# Altium PCB PCB.PcbDoc
Units mm, origin at the board's own origin, x right, y up, seen from the top; angles counter-clockwise.
Board outline 84 x 56 mm, 2 copper layers (Top Layer, Bottom Layer); 30 components, 32 nets, 141 pads, 32 vias.
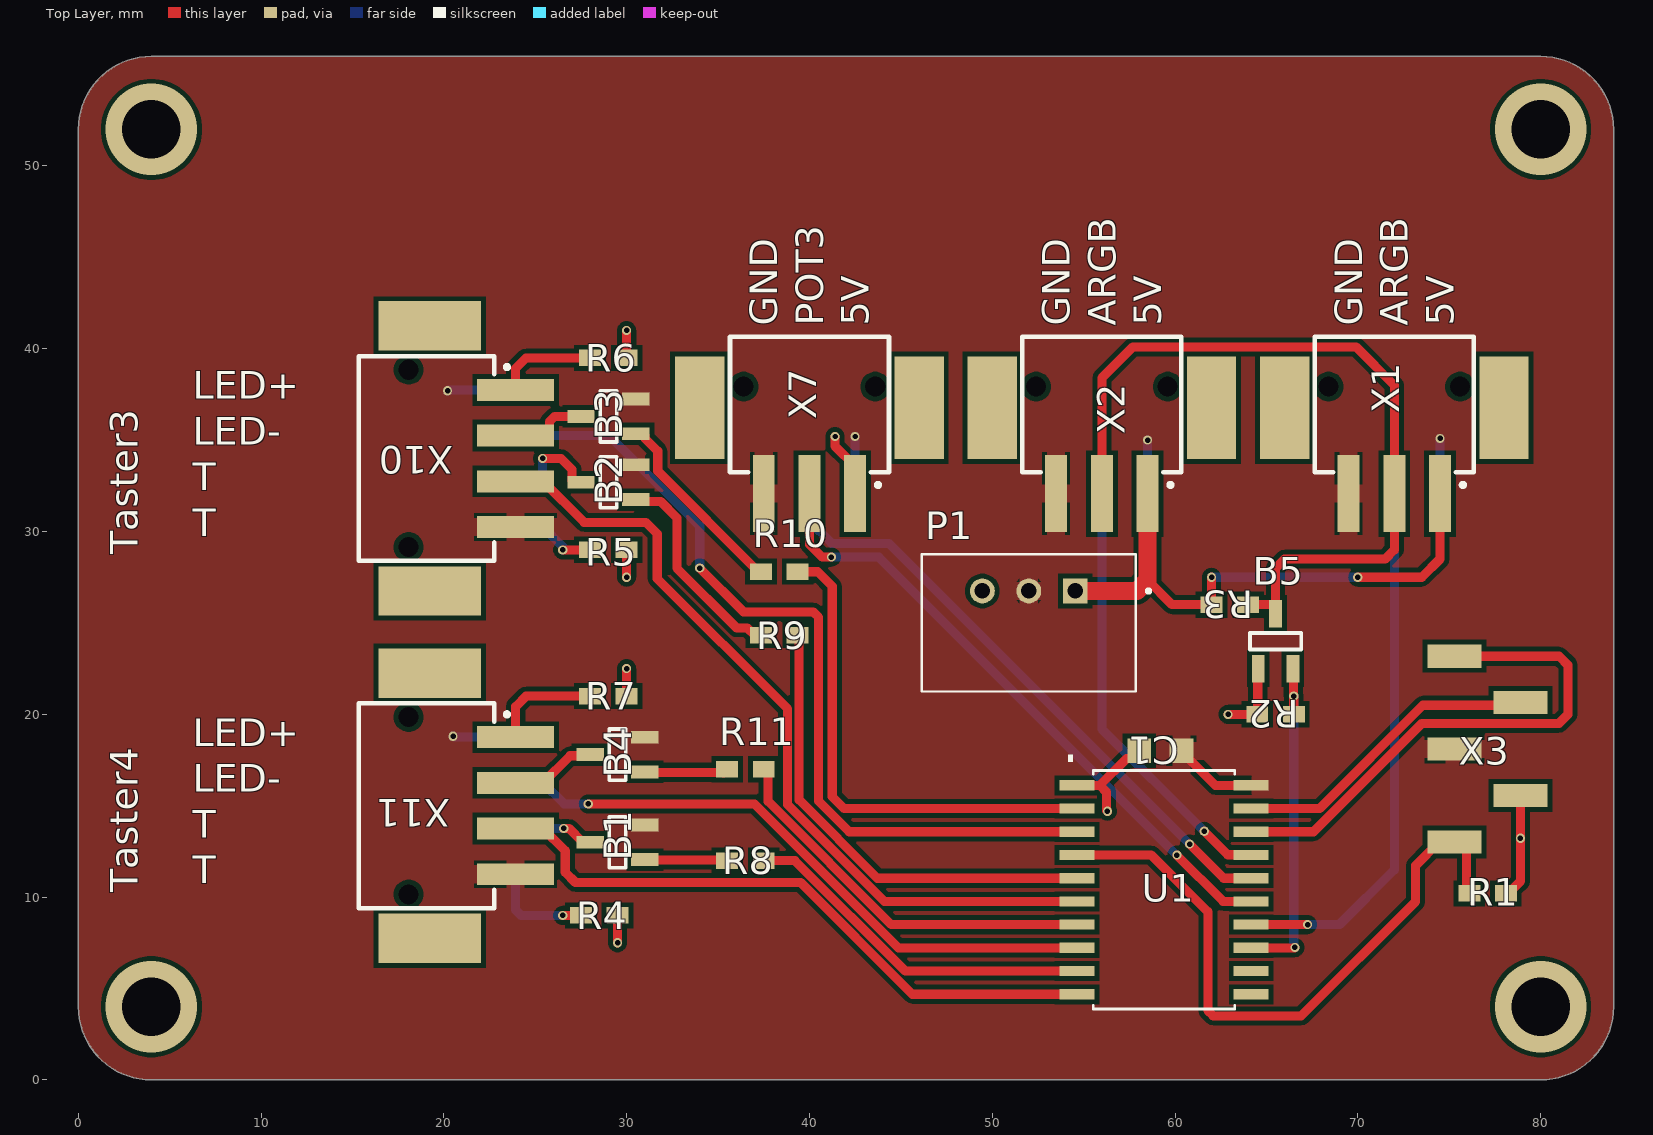
[diagram p0: Top Layer view]
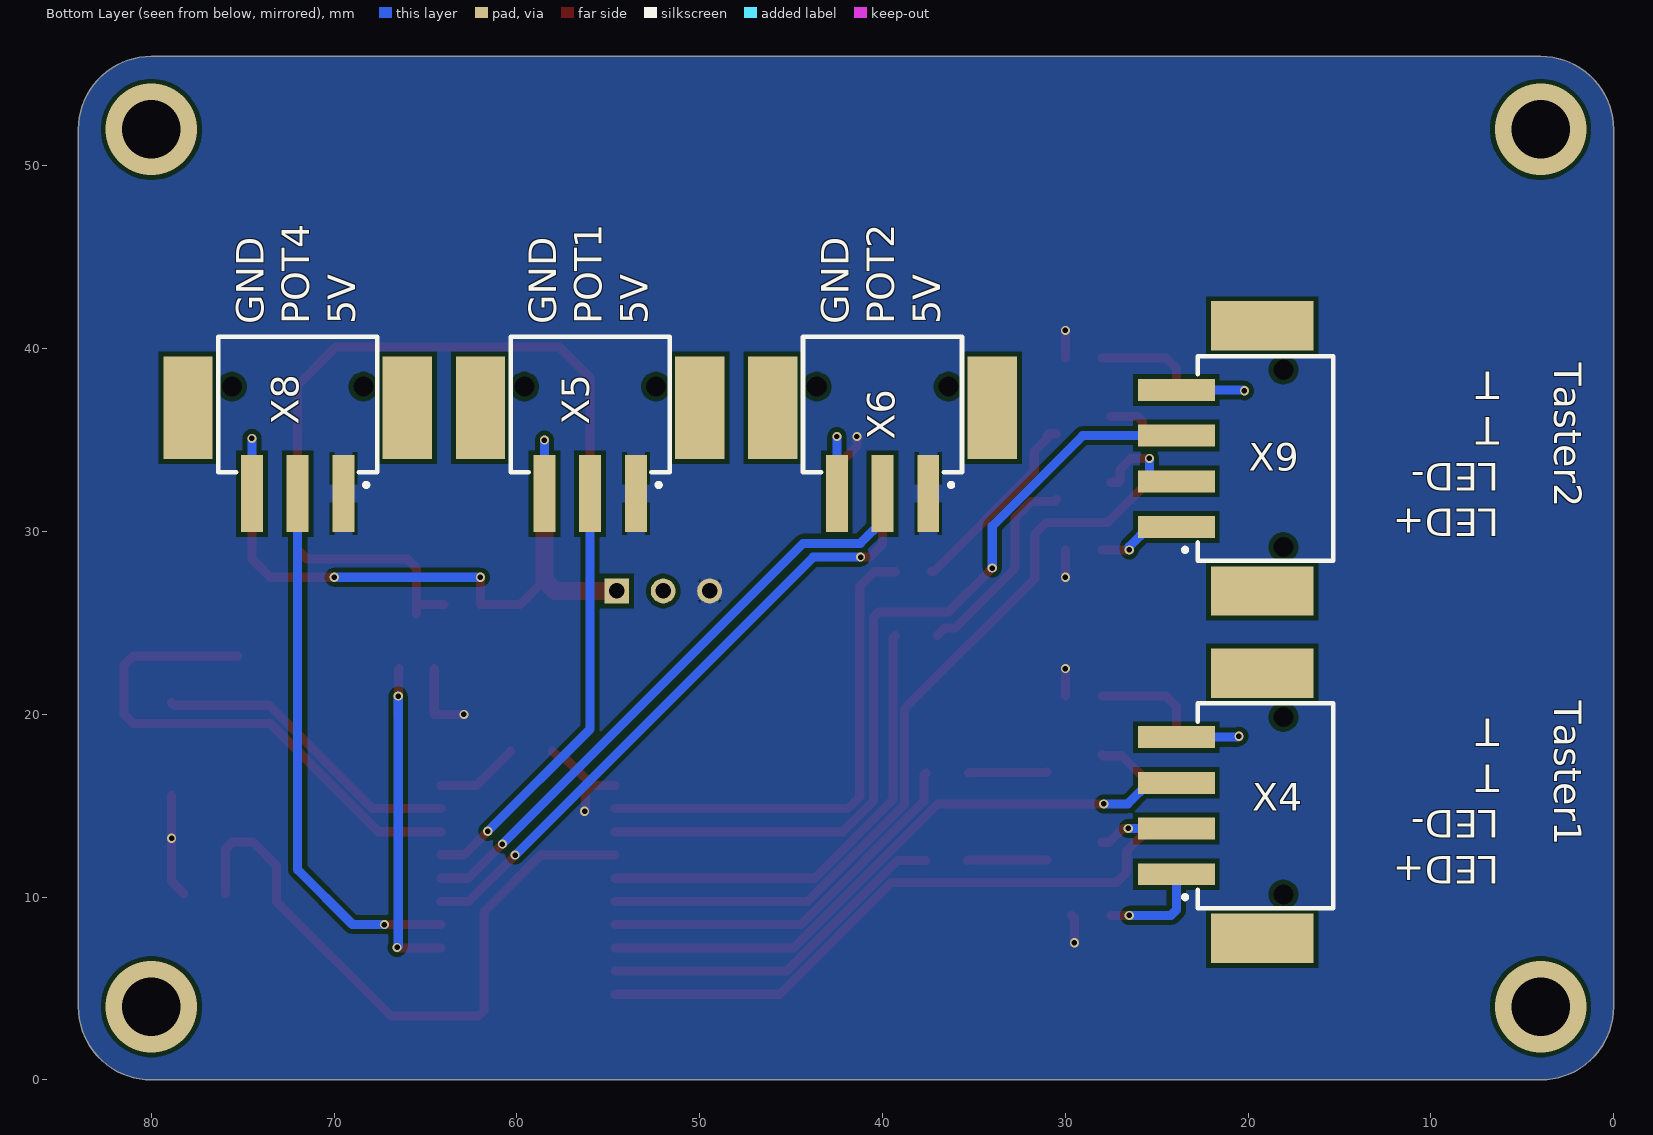
[diagram p1: Bottom Layer view, seen from below]
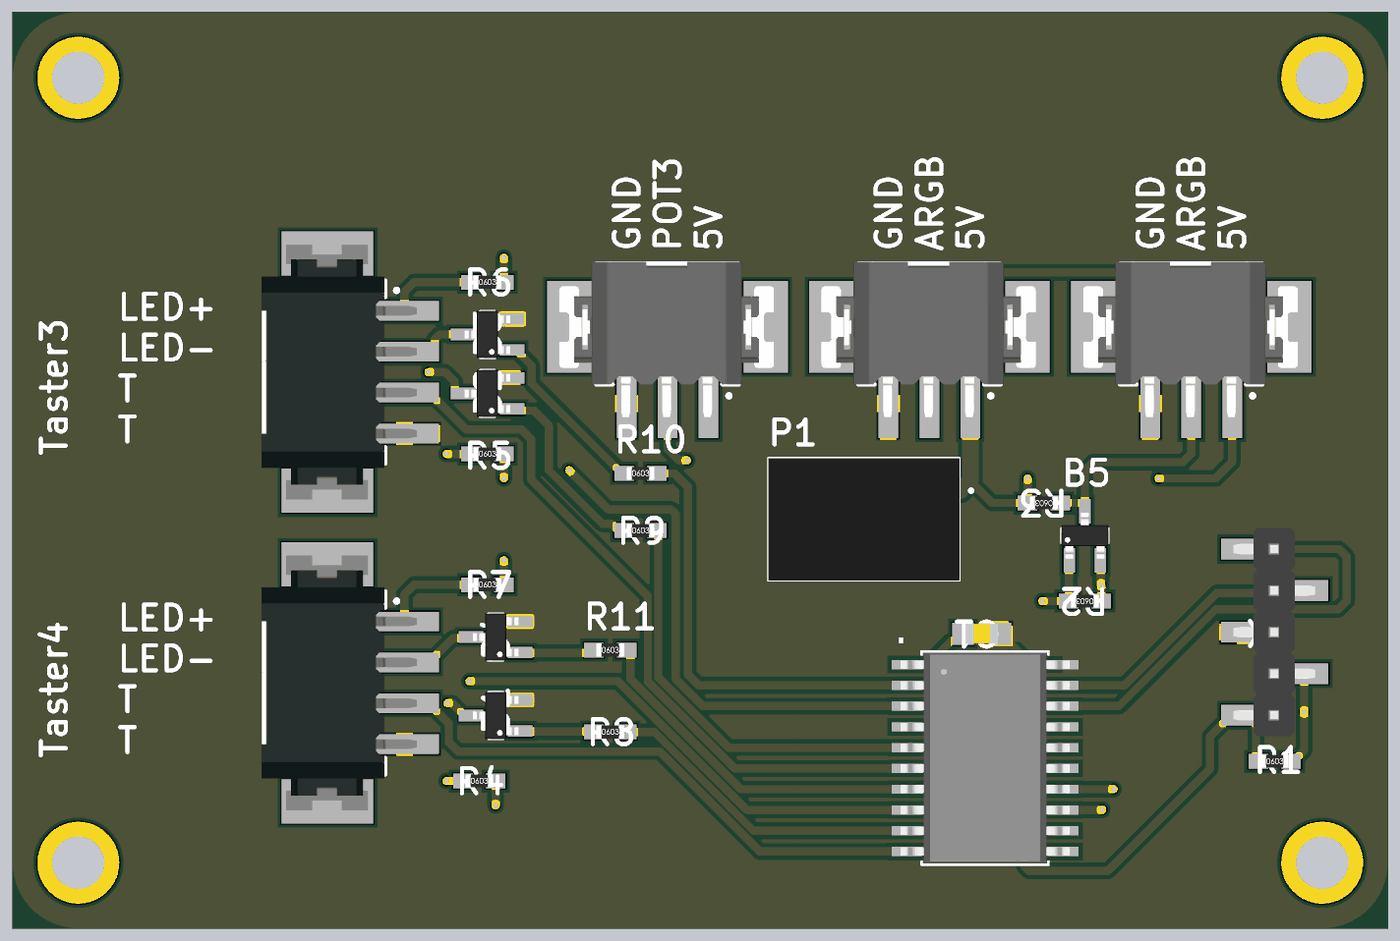
[diagram p2: 3D render of the assembled board from above, using the file's embedded part models]
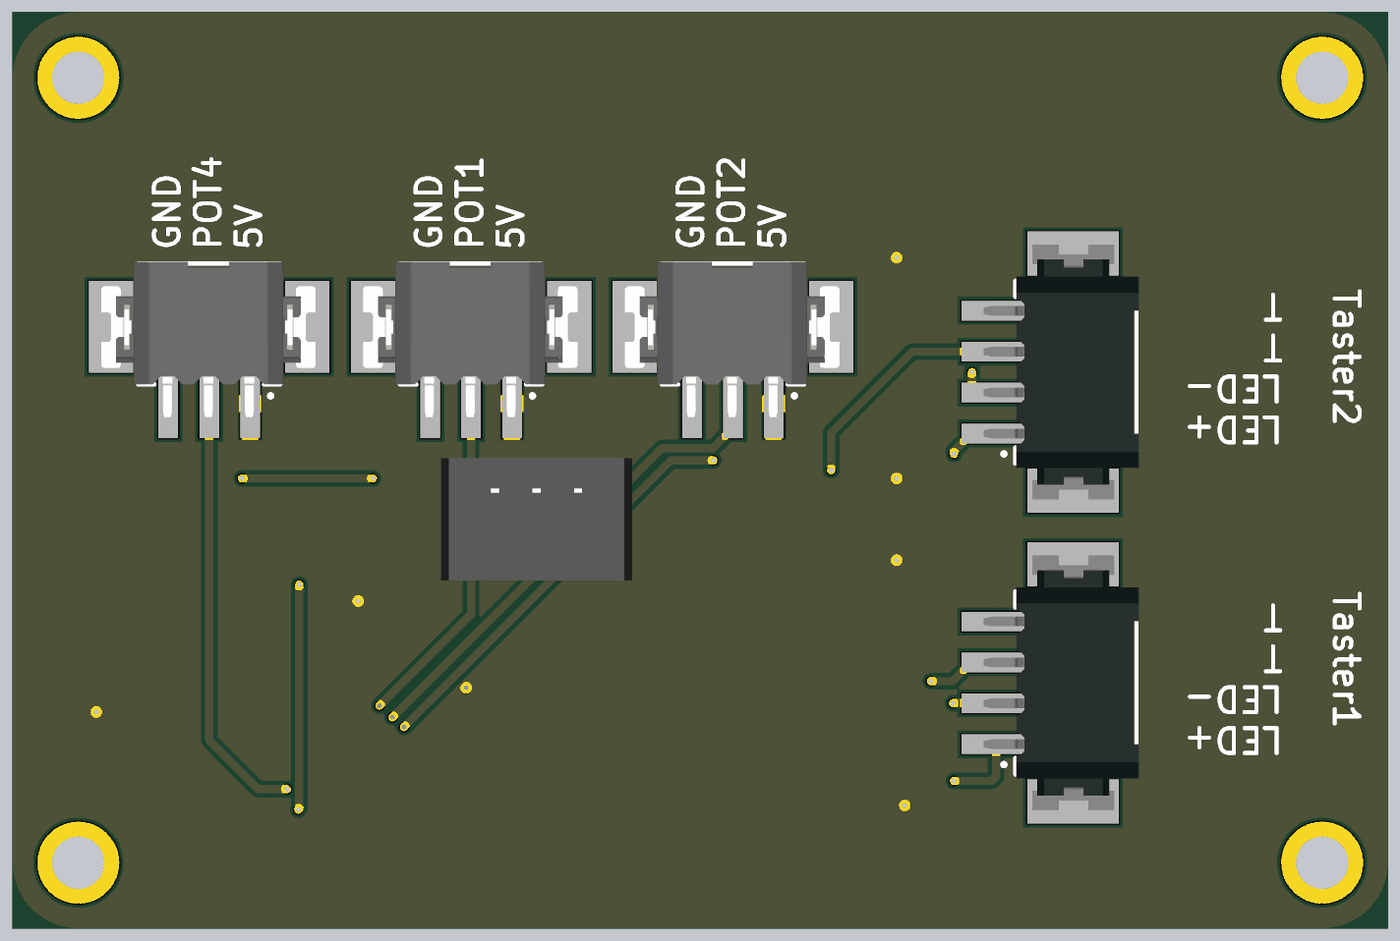
[diagram p3: 3D render of the assembled board from below, using the file's embedded part models]

## Layer stack, top to bottom
Top Solder: solder mask 0.0102, Solder Resist, Dk 3.5
Top Layer: signal copper 0.0356
Dielectric 1: dielectric 0.32, FR-4, Dk 4.8
Bottom Layer: signal copper 0.0356
Bottom Solder: solder mask 0.0102, Solder Resist, Dk 3.5

## Board outline
0,4 0,52 cw(c4,52) 4,56 80,56 cw(c80,52) 84,52 84,4 cw(c80,4) 80,0 4,0 cw(c4,4)

## Design rules (kind name [scope] priority, off if disabled: settings)
Clearance [All] p1: gap=0.254 ignorepadtopadclearanceinfootprint=FALSE except(0: SMDPad-Hole THPad-Hole Via-Hole Fill-Hole Poly-Hole Region-Hole Text-Hole; 0.127: Arc-Arc Arc-Track Track-Track SMDPad-SMDPad; 0.15: Arc-Text Track-Text SMDPad-Text THPad-Text Via-Text Text-Text; 0.2: Arc-SMDPad Arc-THPad Track-SMDPad Track-THPad Fill-Text Poly-Text Region-Text; 0.5: THPad-THPad)
Height [All] p1: minheight=0 maxheight=50 prefheight=12.7
HoleSize [All] p1: absolutevalues=TRUE maxlimit=3.2 minlimit=0.025 maxpercent=80.000 minpercent=20.000
MinimumSolderMaskSliver [OnLayer('Top Layer') vs OnLayer('Top Layer')] p1: minsoldermaskwidth=0.04
PlaneConnect [All] p1: planeconnectstyle=Relief reliefexpansion=0.508 reliefentries=4 reliefconductorwidth=0.3 reliefairgap=0.18
PolygonConnect [All] p1: thpad.connectstyle=Relief thpad.reliefconductorwidth=1.016 thpad.reliefentries=4 thpad.polygonreliefangle="90 Angle" thpad.airgapwidth=0.15 smdpad.connectstyle=Relief smdpad.reliefconductorwidth=1.016 smdpad.reliefentries=4 smdpad.polygonreliefangle="90 Angle" smdpad.airgapwidth=0.15 via.connectstyle=Direct via.reliefconductorwidth=1.016 via.reliefentries=4 via.polygonreliefangle="90 Angle" via.airgapwidth=0.15
RoutingVias [All] p1: holewidth=0.3 width=0.5 viastyle="Through Hole" minholewidth=0.2 minwidth=0.45 maxholewidth=2 maxwidth=3
SilkToSilkClearance [All] p1: silktosilkclearance=0.1
SilkToSolderMaskClearance [IsPad] p1: minsilkscreentomaskgap=0 clearancetoexposedcopper=TRUE
SolderMaskExpansion SolderMaskExpansion_1 [All] p1: expansion=0.102 istentingtop=FALSE
SolderMaskExpansion SolderMaskExpansion_Via [All] p2: expansion=-25 istentingtop=TRUE
Width [All] p1: maxlimit=10 minlimit=0.127 preferedwidth=0.54 minimp=50.000000 maximp=50.000000 favimp=50.000000
24 further rules are at their usual default settings.

## Components (designator, comment, footprint, x,y, rotation, side; value= is the part's Value field where it differs from the comment)
B1 "N Kanal FET" SOT23-3 29.5,13 r90 top
B2 "N Kanal FET" SOT23-3 29,32.7 r90 top
B3 "N Kanal FET" SOT23-3 29,36.3 r90 top
B4 "N Kanal FET" SOT23-3 29.5,17.8 r90 top
B5 "N Kanal FET" SOT23-3 65.5,24 r0 top
C1 "Capacitor 0805" "CAP CER 0805 H" 59.2,18 r180 top value=0.1uF
P1 "TSR_1-2450" TSR_1-2450 52,25 r180 top
R1 "Resistor 0603" "RES 0603 H" 77.1,10.2 r0 top value=10k
R2 "Resistor 0603" "RES 0603 H" 65.5,20 r180 top value=1k
R3 "Resistor 0603" "RES 0603 H" 63,26 r180 top value=1k
R4 "Resistor 0603" "RES 0603 H" 28.5,9 r0 top value=150R
R5 "Resistor 0603" "RES 0603 H" 29,29 r0 top value=150R
R6 "Resistor 0603" "RES 0603 H" 29,39.5 r0 top value=150R
R7 "Resistor 0603" "RES 0603 H" 29,21 r0 top value=150R
R8 "Resistor 0603" "RES 0603 H" 36.5,12 r0 top value=150R
R9 "Resistor 0603" "RES 0603 H" 38.354,24.315 r0 top value=150R
R10 "Resistor 0603" "RES 0603 H" 38.354,27.81 r0 top value=150R
R11 "Resistor 0603" "RES 0603 H" 36.5,17 r0 top value=150R
U1 "PIC18F16Q40-I/SO" SOIC20_SO_MCH-M 59.4,10.4 r0 top
X1 "1778780" "Phoenix 3Pos Header" 72,35 r180 top
X2 "1778780" "Phoenix 3Pos Header" 56,35 r180 top
X3 "ICSP" 5Pin_Header 77.1,18.1 r90 top
X4 "1778780" "Phoenix 4Pos Header" 21,15 r90 bottom
X5 "1778780" "Phoenix 3Pos Header" 56,35 r0 bottom
X6 "1778780" "Phoenix 3Pos Header" 40,35 r0 bottom
X7 "1778780" "Phoenix 3Pos Header" 40,35 r180 top
X8 "1778780" "Phoenix 3Pos Header" 72,35 r0 bottom
X9 "1778780" "Phoenix 4Pos Header" 21,34 r90 bottom
X10 "1778780" "Phoenix 4Pos Header" 21,34 r270 top
X11 "1778780" "Phoenix 4Pos Header" 21,15 r270 top

## Footprints (in the part's own frame and the unit in brackets; to place one, negate y for a bottom-side part, rotate by r counter-clockwise, add the part's x,y. Pads: shape width x height; smd on the part's side, far side on the other; paste and mask are expansions set on the pad)
5Pin_Header [mm]
  rect 1.27x2.96 smd: 1(-5.08,1.8) 2(-2.54,-1.8) 3(0,1.8) 4(2.54,-1.8) 5(5.08,1.8)
  body extent -6.35,-2.46 6.35,2.54, height 9.7
"CAP CER 0805 H" [mm] "0805 ceramic capacitor for hand soldering"
  rect 1.3x1.35 smd: 1(-1.15,0) 2(1.15,0)
  body extent -1,-0.62 1,0.63, height 0.8
"Phoenix 3Pos Header" [mm] "MFR. 1778780"
  rect 1.2x4.2 smd: 1(-2.5,2.925) 2(0,2.925) 3(2.5,2.925)
  round 0 hole 1.1: 46(-3.6,-2.925) 46(3.6,-2.925)
  rect 2.7x5.6 smd: ""(-6,-1.775) ""(6,-1.775)
  silkscreen extent -4.35,-5.65 4.35,2.55, body extent -6.5,-5.75 6.6,3.75, height 5
"Phoenix 4Pos Header" [mm] "MFR. 1778780"
  rect 1.2x4.2 smd: 1(-3.75,2.925) 2(-1.25,2.925) 3(1.25,2.925) 4(3.75,2.925)
  round 0 hole 1.1: 46(-4.85,-2.925) 46(4.85,-2.925)
  rect 2.7x5.6 smd: ""(-7.25,-1.775) ""(7.25,-1.775)
  silkscreen extent -5.6,-5.65 5.6,2.55, body extent -7.8,-5.8 7.8,3.7, height 5
"RES 0603 H" [mm] "0603 resistor for hand soldering"
  rect 1.2x0.9 smd: 1(-1,0) 2(1,0)
  body extent -0.85,-0.4 0.85,0.4, height 0.56
SOIC20_SO_MCH-M [mil]
  rect 75x22 smd paste+0 mask+0: 1(-187.5,225) 2(-187.5,175) 3(-187.5,125) 4(-187.5,75) 5(-187.5,25) 6(-187.5,-25) 7(-187.5,-75) 8(-187.5,-125) 9(-187.5,-175) 10(-187.5,-225) 11(187.5,-225) 12(187.5,-175) 13(187.5,-125) 14(187.5,-75) 15(187.5,-25) 16(187.5,25) 17(187.5,75) 18(187.5,125) 19(187.5,175) 20(187.5,225)
  silkscreen extent -207,-257 152,291, body extent -203,-252 203,252, height 104
SOT23-3 [mm] "SOT23-3"
  rect 0.7x1.5 smd: 1(-0.95,-1.5) 2(0.95,-1.5) 3(0,1.5)
  silkscreen extent -1.4,-0.45 1.4,0.45, body extent -1.45,-1.4 1.45,1.4, height 1.3
TSR_1-2450 [mm] "Traco DC/DC 5V"
  rect 1.358x1.358 hole 0.85: 1(-2.54,-1.75)
  round 1.358 hole 0.85: 2(0,-1.75) 3(2.54,-1.75)
  silkscreen extent -6.65,-3.75 5.85,3.75, body extent -5.85,-3.75 5.85,3.75, height 4.8

## Part data
P1: "1 Amp POL switching regulator, 4.6 to -36 VDC input, pos.-pos. circuit, LM78 compatible, SIP-3", Package="SIP-3 Traco Power", Availability="In Stock", Check_prices=https://www.snapeda.com/parts/TSR%201-2450/Traco%20Power/view-part/5914857/?ref=eda, MF="Traco Power", MP="TSR 1-2450", Price=None, Purchase-URL="https://pricing.snapeda.com/search/part/TSR 1-2450/?ref=eda", SnapEDA_Link=https://www.snapeda.com/parts/TSR%201-2450/Traco%20Power/view-part/5914857/?ref=snap
U1: "No Description Available", Mfr_Name=Microchip, Copyright="Copyright (C) 2021 Ultra Librarian. All rights reserved.", Digi-Key_Part_Number_1=150-PIC18F16Q40-I/SO-ND, Manufacturer_Part_Number=PIC18F16Q40-I/SO, RefDes=RefDes, Type=DEV
X1 X2 X5 X6 X7 X8: library part "Phoenix 3Pos Header"
X4 X9 X10 X11: library part "Phoenix 4Pos Header"

## Via types
v1: diameter 0.5, hole 0.3, Top Layer to Bottom Layer, 28 vias
v2: diameter 5, hole 3.2, Top Layer to Bottom Layer, 4 vias

## Nets (pads, with @x,y where several pads share a name; then routed paths per layer and width w, separated by ;. In a path a pad name is that pad's centre, name@x,y a point inside that pad or via, vN(x,y) a via of type N, cw(c..) or ccw(c..) an arc to the next point about the centre after c; other vN are vias at no path point)
+5: B5.1 C1.2 P1.3 R1.2 R2.2 R4.2 R5.2 R6.2 R7.2 U1.1 X3.2 X5.1 X6.1 X7.1 X8.1 | length 25
  Top Layer w0.5: v1(29.5,7.5) 29.5,8.85 R4.2@29.65,9 ; R7.2 v1(30,22.5) ; v1(30,27.5) R5.2 ; R6.2 v1(30,41) ; v1(41.4,35.2) 41.4,34.675 42.5,33.575 X7.1 ; U1.1 55.885,16.115 ; v1(56.3,14.7) 56.253,14.747 56.253,15.747 55.885,16.115 ; C1.2 58.05,17.975 57.65,17.575 57.345,17.575 55.885,16.115 ; v1(62.9,20) R2.2@64.35,20 ; R2.2 64.525,20.025 64.525,22.475 B5.1 ; R1.2@78.25,10.2 78.25,10.225 78.9,10.875 v1(78.9,13.217) X3.2
+12V: P1.1 R3.2 X1.1 X2.1 | length 31
  Top Layer w0.5: 58.5,27.336 59.836,26 R3.2 v1(62,27.5) ; v1(70,27.5) 73.5,27.5 74.5,28.5 X1.1
  Top Layer w1: P1.1 57.914,26.75 58.5,27.336 X2.1@58.5,32.075
  Bottom Layer w0.5: v1(62,27.5) v1(70,27.5)
ARGB_5V: B5.2 R2.1 U1.13 | length 18.7
  Top Layer w0.5: U1.13 66.539,7.225 v1(66.56,7.245) ; B5.2 66.475,22.475 v1@66.475,21 ; R2.1 v1(66.5,21)
  Bottom Layer w0.5: v1(66.5,21) 66.5,7.305 v1(66.56,7.245)
ARGB_12V: B5.3 R3.1 X1.2 X2.2 | length 43.9
  Top Layer w0.5: X2.2 56,35 56,38.4 57.7,40.1 69.9,40.1 72,38 X1.2 72,29 71.5,28.5 66,28.5 65.5,28 B5.3@65.5,25.9 ; R3.1 65.4,26 B5.3@65.5,25.9 ; B5.3 B5.3@65.5,25.9
GND: B1.2 B2.2 B3.2 B4.2 C1.1 P1.2 U1.20 X1.3 X2.3 X3.3 X4.4 X5.3 X6.3 X7.3 X8.3 X9.4 X10.4 X11.4 | length 20.9
  Top Layer w0.5: C1.1 60.35,17.975 62.21,16.115 U1.20
  Bottom Layer w0.5: v1(20.2,37.7) 20.25,37.75 X9.4 ; v1(20.5,18.8) 20.55,18.75 X4.4 ; X6.3 v1(42.5,35.2) ; X5.3 v1@58.5,35 ; X8.3 v1(74.5,35.1)
  other v1: 58.5,35
ICLK: U1.18 X3.5 | length 29.1
  Top Layer w0.5: U1.18 67.575,13.575 73.5,19.5 81,19.5 81.5,20 81.5,22.694 81.014,23.18 X3.5
IDAT: U1.19 X3.4 | length 17.1
  Top Layer w0.5: U1.19 67.907,14.845 73.562,20.5 78.76,20.5 X3.4
LED1: R8.2 U1.9 | length 19.5
  Top Layer w0.5: R8.2@37.65,12 39.203,12 45.248,5.955 U1.9
LED2: R9.2 U1.5 | length 26
  Top Layer w0.5: R9.2@39.3,24.3 39.432,24.168 39.432,15.318 43.715,11.035 U1.5
LED3: R10.2 U1.2 | length 27.4
  Top Layer w0.5: R10.2@39.3,27.8 40.45,27.8 41.25,27 41.25,15.5 41.905,14.845 U1.2
LED4: R11.2 U1.7 | length 21.3
  Top Layer w0.5: R11.2@37.6,16.8 37.738,16.662 37.738,15.238 44.482,8.495 U1.7
MCLR: R1.1 U1.4 X3.1 | length 35.8
  Top Layer w0.5: U1.4 58.695,12.305 61.8,9.2 61.8,3.793 62.093,3.5 66.9,3.5 73.155,9.755 73.155,11.72 74.455,13.02 X3.1 75.565,13.02 75.95,12.635 R1.1@75.95,10.2
NetB1_1: B1.1 R8.1 | length 4.4
  Top Layer w0.5: B1.1 31.025,12.025 35.325,12.025 R8.1@35.35,12
NetB1_3: B1.3 X4.2 | length 4.4
  Top Layer w0.5: v1(26.555,13.757) 26.843,13.757 27.6,13 B1.3
  Bottom Layer w0.5: X4.2 23.932,13.757 v1(26.555,13.757)
NetB2_1: B2.1 R9.1 | length 11.2
  Top Layer w0.5: B2.1 30.6,31.65 31.85,31.65 32.75,30.75 32.75,28 36.025,24.725 36.6,24.725 R9.1@37,24.325
NetB2_3: B2.3 X9.2 | length 5.5
  Top Layer w0.5: v1(25.4,34) 26.4,34 27,33.4 27,32.8 27.1,32.7 B2.3
  Bottom Layer w0.5: X9.2 25.05,32.75 25.4,33.1 v1(25.4,34)
NetB3_1: B3.1 R10.1 | length 10.7
  Top Layer w0.5: B3.1 30.9,35.35 31,35.25 31,35.1 31.7,34.4 31.7,33.314 37.204,27.81 R10.1
NetB3_3: B3.3 X10.2 | length 4.2
  Top Layer w0.5: X10.2 25.425,35.25 25.775,35.6 25.775,36.007 26.068,36.3 B3.3
NetB4_1: B4.1 R11.1 | length 4.3
  Top Layer w0.5: B4.1 31.025,16.825 35.275,16.825 R11.1@35.3,16.8
NetB4_3: B4.3 X11.2 | length 4.7
  Top Layer w0.5: X11.2 25.425,16.25 26.907,17.732 27.932,17.732 B4.3
NetR4_1: R4.1 X4.1 | length 5.7
  Top Layer w0.5: v1(26.5,9) R4.1
  Bottom Layer w0.5: X4.1 23.925,9.293 24.218,9 v1(26.5,9)
NetR5_1: R5.1 X9.1 | length 4.7
  Top Layer w0.5: v1(26.5,29) R5.1
  Bottom Layer w0.5: X9.1 25.425,30.25 26.5,29.175 v1(26.5,29)
NetR6_1: R6.1 X10.1 | length 5.5
  Top Layer w0.5: X10.1 23.925,38.925 24.5,39.5 R6.1
NetR7_1: R7.1 X11.1 | length 6
  Top Layer w0.5: X11.1 23.925,20.425 24.5,21 R7.1
POT1: U1.17 X5.2 | length 23.9
  Top Layer w0.5: v1(61.6,13.6) 62.882,12.318 64.15,12.318 U1.17
  Bottom Layer w0.5: X5.2 56,19.2 v1(61.6,13.6)
POT2: U1.16 X6.2 | length 33.8
  Top Layer w0.5: v1(60.8,12.9) 62.665,11.035 U1.16
  Bottom Layer w0.5: X6.2 40,30.575 41.221,29.354 44.346,29.354 v1(60.8,12.9)
POT3: U1.15 X7.2 | length 35
  Top Layer w0.5: X7.2 40,29.3 40.7,28.6 v1(41.2,28.6) ; v1(60.1,12.3) 62.635,9.765 U1.15
  Bottom Layer w0.5: v1(41.2,28.6) 43.8,28.6 v1(60.1,12.3)
POT4: U1.14 X8.2 | length 29.7
  Top Layer w0.5: U1.14 67.249,8.495 v1(67.254,8.5)
  Bottom Layer w0.5: v1(67.254,8.5) 69,8.5 72,11.5 X8.2
T1: U1.8 X4.3 | length 34.5
  Top Layer w0.5: v1(27.9,15.1) 36.99,15.1 44.865,7.225 U1.8
  Bottom Layer w0.5: X4.3 25.425,16.25 26.575,15.1 v1(27.9,15.1)
T2: U1.3 X9.3 | length 46.9
  Top Layer w0.5: v1(34,28) 36.4,25.6 40.207,25.6 40.5,25.307 40.5,15.25 42.175,13.575 U1.3
  Bottom Layer w0.5: X9.3 29.05,35.25 34,30.3 v1(34,28)
T3: U1.6 X10.3 | length 44.7
  Top Layer w0.5: X10.3 25.425,32.75 27.675,30.5 31.043,30.5 31.673,29.87 31.673,27.427 38.805,20.295 38.805,15.058 44.098,9.765 U1.6
T4: U1.10 X11.3 | length 35.2
  Top Layer w0.5: X11.3 25.425,13.75 26.638,12.537 26.638,11.362 27.2,10.8 39.516,10.8 45.631,4.685 U1.10
pads on no net: U1.11 U1.12 X1. X1.46 X2. X2.46 X4. X4.46 X5. X5.46 X6. X6.46 X7. X7.46 X8. X8.46 X9. X9.46 X10. X10.46 X11. X11.46
copper on no net:
  other v2: 4,4 80,4 4,52 80,52

## Polygon pours and split planes (outlines as drawn)
+5 on Bottom Layer "+5_L02_P000" (solid, pour order 0): 0,4 0,52 cw(c4,52) 4,56 80,56 cw(c80,52) 84,52 84,4 cw(c80,4) 80,0 4,0 cw(c4,4)
GND on Top Layer "GND_L01_P001" (solid, pour order 1): 0,4 0,52 cw(c4,52) 4,56 80,56 cw(c80,52) 84,52 84,4 cw(c80,4) 80,0 4,0 cw(c4,4)

## Silkscreen, mask and mechanical layers (free items; w line width, h text height)
Top Overlay:
  text "GND" at 38.246,41.254 h1.52 r90
  text "POT3" at 40.746,41.254 h1.52 r90
  text "5V" at 43.246,41.254 h1.52 r90
  text "GND" at 54.246,41.254 h1.52 r90
  text "ARGB" at 56.746,41.254 h1.52 r90
  text "5V" at 59.246,41.254 h1.52 r90
  text "GND" at 70.246,41.254 h1.52 r90
  text "ARGB" at 72.746,41.254 h1.52 r90
  text "5V" at 75.246,41.254 h1.52 r90
  text "LED+" at 6.254,37.254 h1.52
  text "LED-" at 6.254,34.754 h1.52
  text "T" at 6.254,32.254 h1.52
  text "T" at 6.254,29.754 h1.52
  text "Taster3" at 3.246,28.754 h1.52 r90
  text "LED+" at 6.254,18.254 h1.52
  text "LED-" at 6.254,15.754 h1.52
  text "T" at 6.254,13.254 h1.52
  text "T" at 6.254,10.754 h1.52
  text "Taster4" at 3.246,10.254 h1.52 r90
Bottom Overlay:
  text "5V" at 36.854,41.329 h1.52 r270
  text "POT2" at 39.354,41.329 h1.52 r270
  text "GND" at 41.854,41.329 h1.52 r270
  text "5V" at 52.854,41.329 h1.52 r270
  text "POT1" at 55.354,41.329 h1.52 r270
  text "GND" at 57.854,41.329 h1.52 r270
  text "5V" at 68.854,41.329 h1.52 r270
  text "POT4" at 71.354,41.329 h1.52 r270
  text "GND" at 73.854,41.329 h1.52 r270
  text "Taster2" at 3.246,39.246 h1.52 r90
  text "T" at 6.254,38.746 h1.52 r180
  text "T" at 6.254,36.246 h1.52 r180
  text "LED-" at 6.254,33.746 h1.52 r180
  text "LED+" at 6.254,31.246 h1.52 r180
  text "Taster1" at 3.246,20.746 h1.52 r90
  text "T" at 6.254,19.746 h1.52 r180
  text "T" at 6.254,17.246 h1.52 r180
  text "LED-" at 6.254,14.746 h1.52 r180
  text "LED+" at 6.254,12.246 h1.52 r180
Mechanical 1:
  the board outline again, w0.254